# Altium PCB SPlitRail_DC-DC_Converter_PCB.PcbDoc
Units mil, origin at the board's own origin, x right, y up, seen from the top; angles counter-clockwise.
Board outline 3356.49 x 1978.53 mil, 2 copper layers (Top Layer, Bottom Layer), stack 21 mil thick; 34 components, 18 nets, 77 pads, 158 vias.
Unrouted connection lines stored in the file: 5.
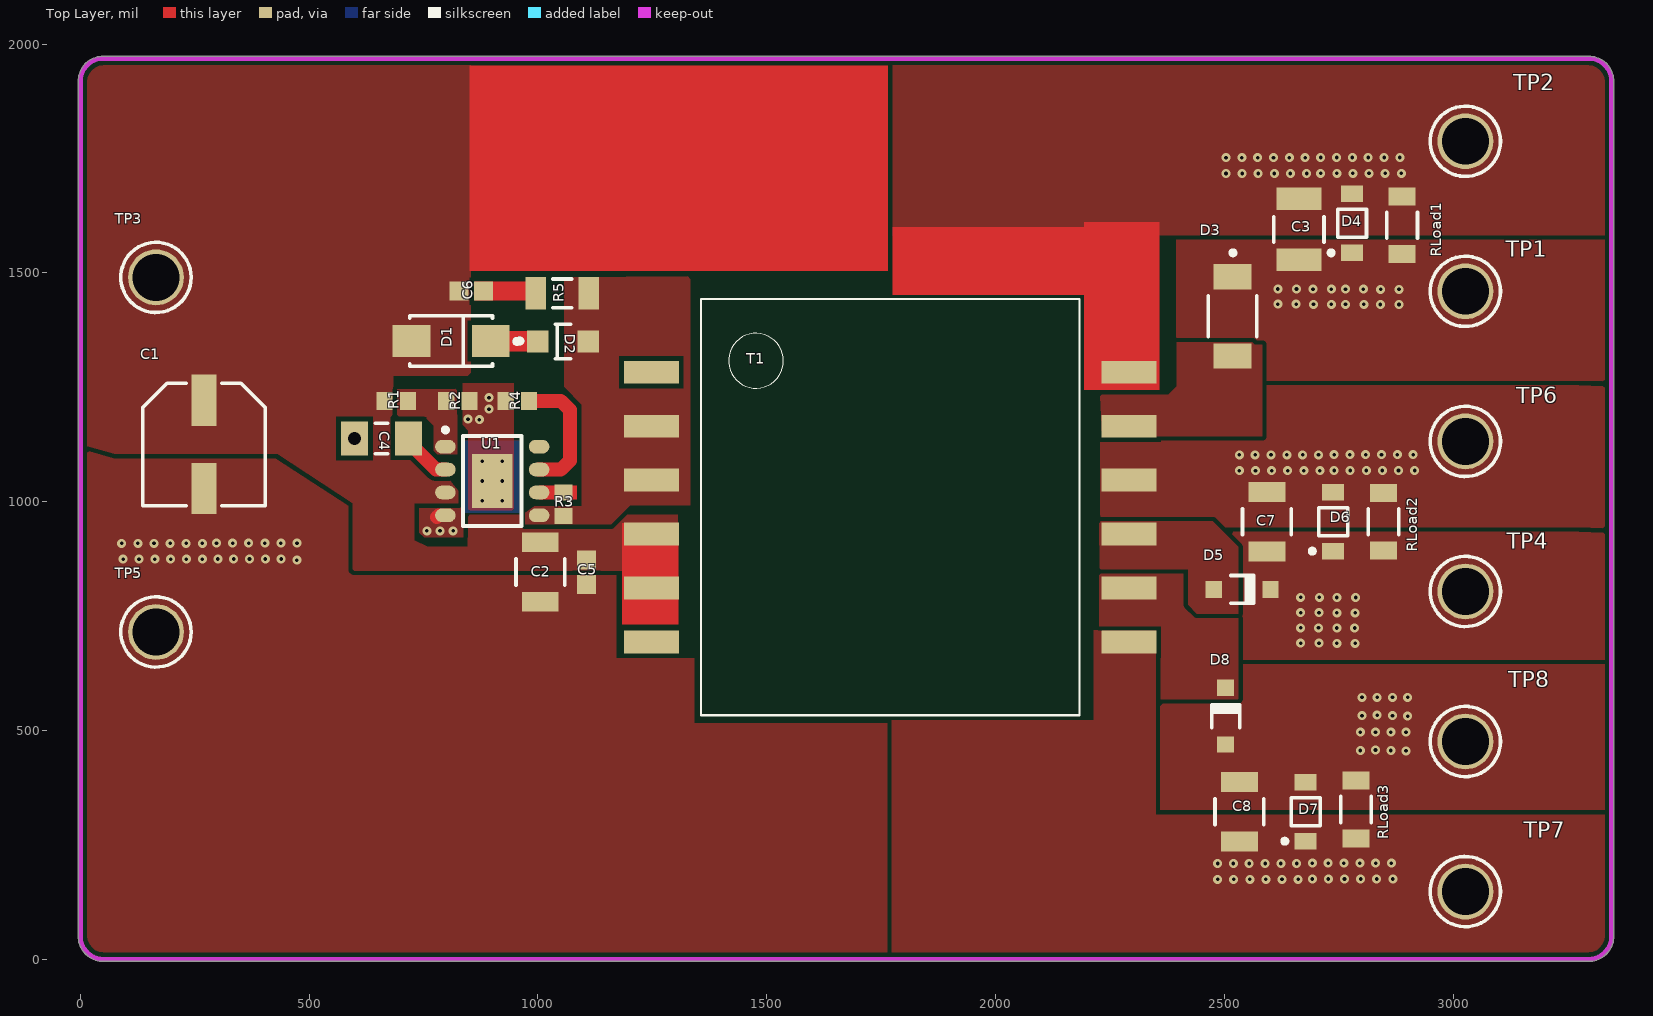
[diagram p0: Top Layer view]
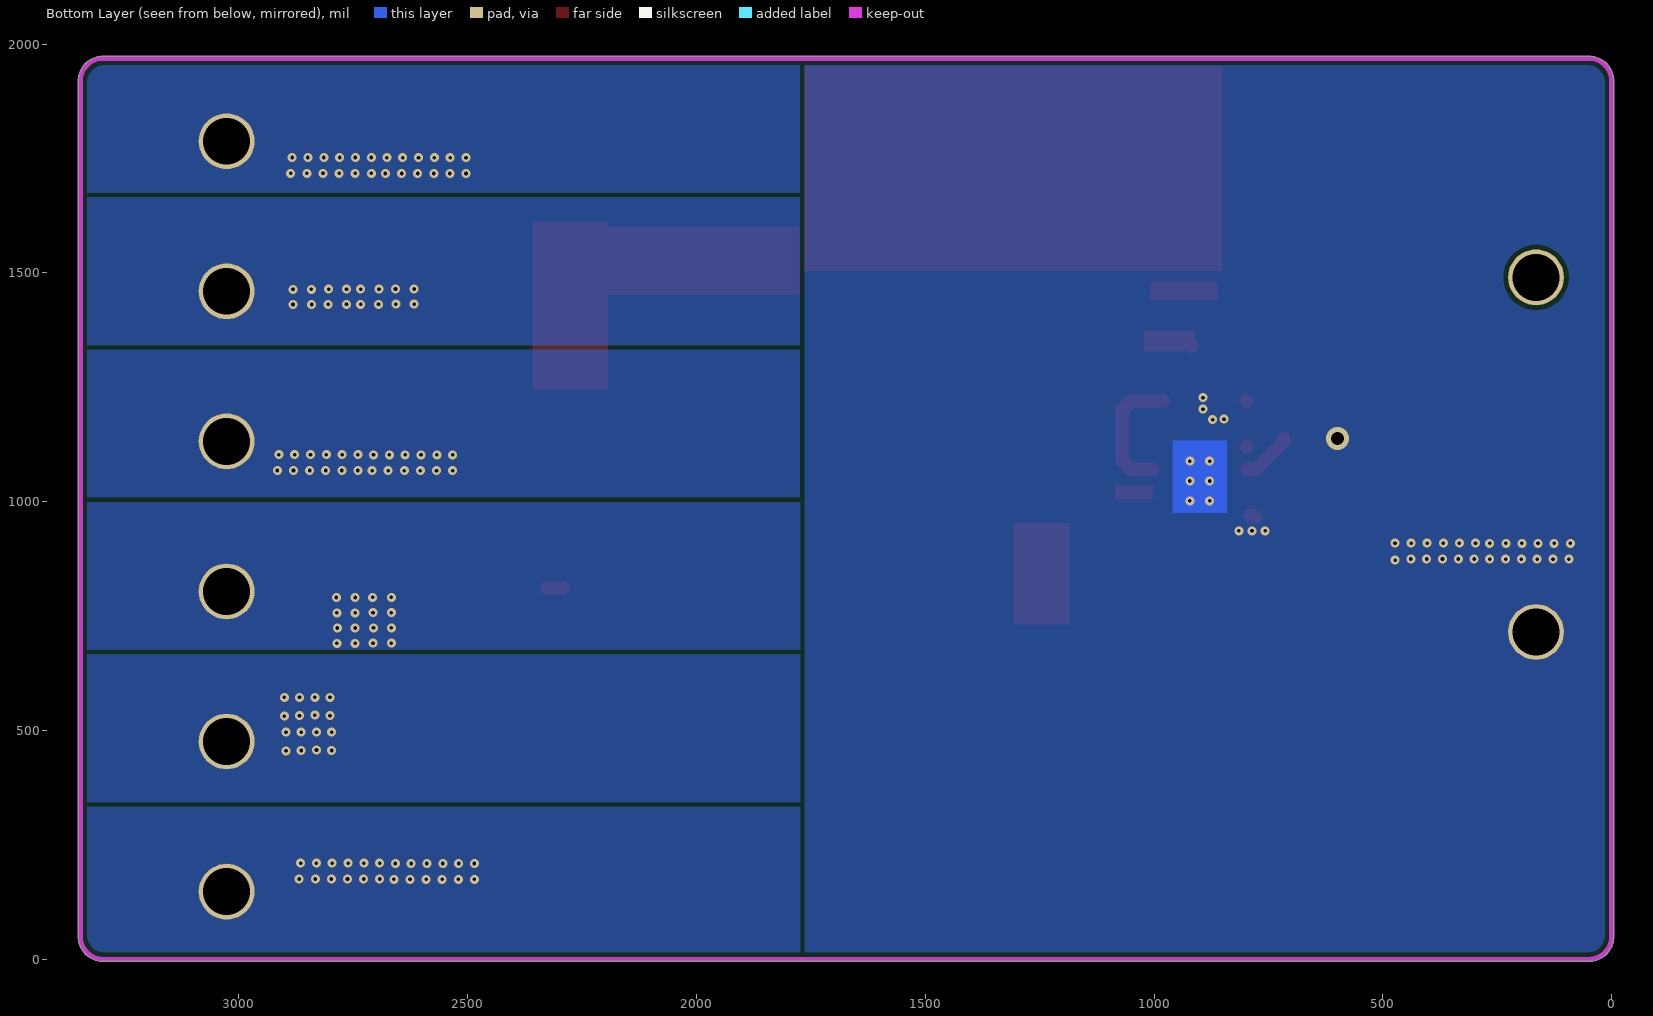
[diagram p1: Bottom Layer view, seen from below]
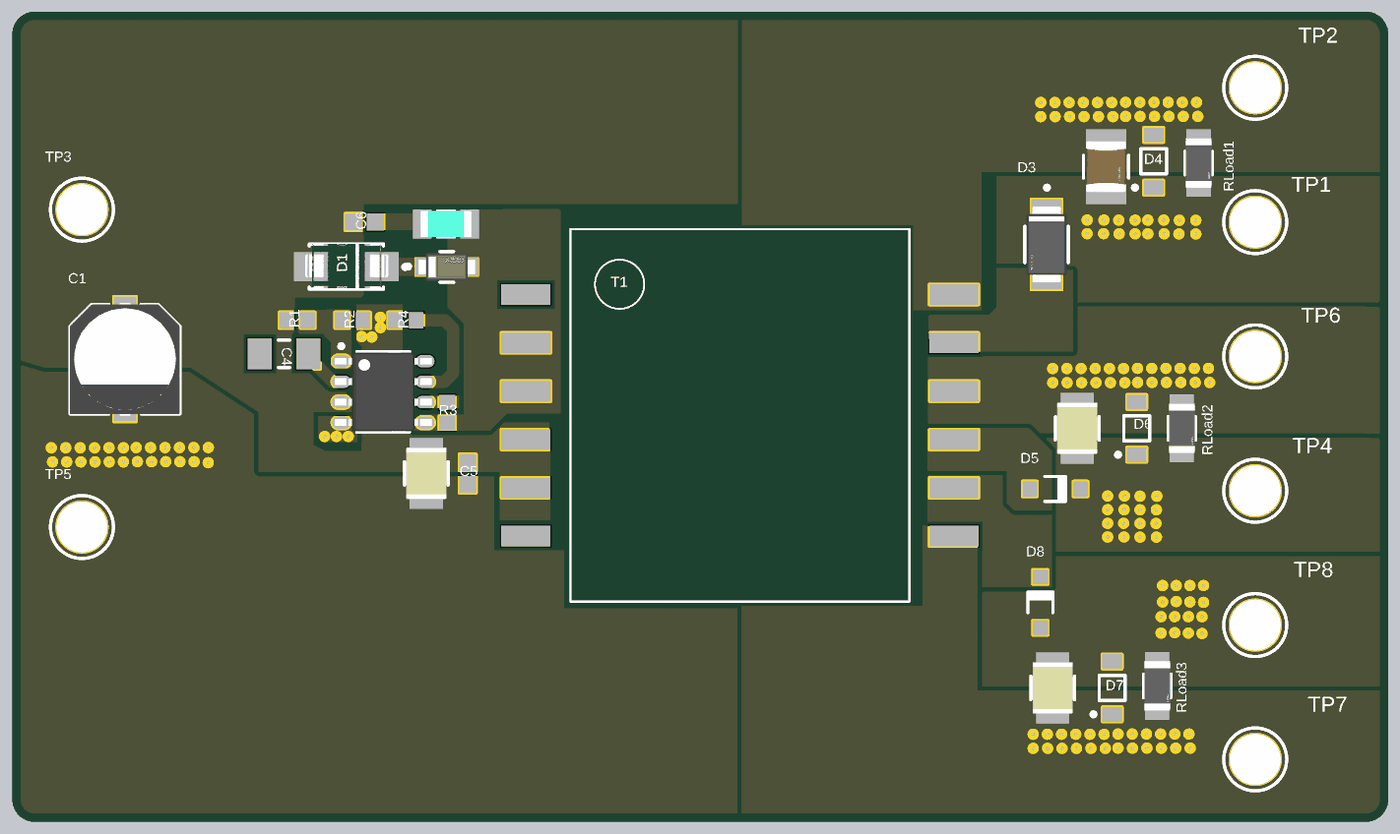
[diagram p2: 3D render of the assembled board from above, using the file's embedded part models]

## Layer stack, top to bottom
Top Solder: solder mask 0.4, Solder Resist, Dk 3.5
Top Layer: signal copper 1.4
Dielectric 2: prepreg 2.8, PP-006, Dk 4.1
Dielectric 1: dielectric 12.6, FR-4, Dk 4.8
Dielectric 3: prepreg 2.8, PP-006, Dk 4.1
Bottom Layer: signal copper 1.4
Bottom Solder: solder mask 0.4, Solder Resist, Dk 3.5

## Board outline
50,-5.01 cw(c50,50) -5.01,50 -5.01,1918.5 cw(c50,1918.5) 50,1973.52 3296.46,1973.52 cw(c3296.46,1918.5) 3351.47,1918.5 3351.47,50 cw(c3296.46,50) 3296.46,-5.01

## Design rules (kind name [scope] priority, off if disabled: settings)
Clearance [All] p1: gap=10 ignorepadtopadclearanceinfootprint=TRUE except(0: Arc-Hole Track-Hole SMDPad-Hole THPad-Hole Via-Hole Fill-Hole Poly-Hole Region-Hole Text-Hole)
MinimumSolderMaskSliver [All] p1 off: minsoldermaskwidth=10
PolygonConnect PolygonConnect_6 [All vs IsNamedPolygon('GND1_L01_P002') Or IsNamedPolygon('NETD2_2_L01_P001')] p1: connectstyle=Direct reliefconductorwidth=10 reliefentries=4 polygonreliefangle="90 Angle" airgapwidth=10
PolygonConnect PolygonConnect_5 [All vs IsNamedPolygon('NETR4_1_L01_P001')] p2: connectstyle=Direct reliefconductorwidth=10 reliefentries=4 polygonreliefangle="90 Angle" airgapwidth=10
PolygonConnect PolygonConnect_4 [All vs IsNamedPolygon('NETD2_2_L01_P001')] p3: connectstyle=Direct reliefconductorwidth=10 reliefentries=4 polygonreliefangle="90 Angle" airgapwidth=10
PolygonConnect PolygonConnect_3 [All vs IsNamedPolygon('GND_L01_P000')] p4: thpad.connectstyle=Direct thpad.reliefconductorwidth=10 thpad.reliefentries=4 thpad.polygonreliefangle="90 Angle" thpad.airgapwidth=10 smdpad.connectstyle=Direct smdpad.reliefconductorwidth=10 smdpad.reliefentries=4 smdpad.polygonreliefangle="90 Angle" smdpad.airgapwidth=10 via.connectstyle=Relief via.reliefconductorwidth=10 via.reliefentries=4 via.polygonreliefangle="90 Angle" via.airgapwidth=10
PolygonConnect PolygonConnect_2 [All vs IsNamedPolygon('GND_L01_P000')] p5: connectstyle=Relief reliefconductorwidth=10 reliefentries=4 polygonreliefangle="90 Angle" airgapwidth=10
PolygonConnect PolygonConnect_1 [All vs IsNamedPolygon('GND_L01_P000')] p6: thpad.connectstyle=Direct thpad.reliefconductorwidth=10 thpad.reliefentries=4 thpad.polygonreliefangle="90 Angle" thpad.airgapwidth=10 smdpad.connectstyle=Direct smdpad.reliefconductorwidth=10 smdpad.reliefentries=4 smdpad.polygonreliefangle="90 Angle" smdpad.airgapwidth=10 via.connectstyle=Relief via.reliefconductorwidth=10 via.reliefentries=4 via.polygonreliefangle="90 Angle" via.airgapwidth=10
PolygonConnect [All] p7: connectstyle=Direct reliefconductorwidth=10 reliefentries=4 polygonreliefangle="90 Angle" airgapwidth=10
RoutingVias [All] p1 off: holewidth=39.37 width=49.21 viastyle="Through Hole" minholewidth=9.84 minwidth=19.68 maxholewidth=39.37 maxwidth=49.21 useviatemplates=TRUE viatemplateguid#1={C01CA102-A0C5-4EF5-919D-0AE4D39FA0B3} viatemplatename#1=v50h20
SilkToSilkClearance [All] p1 off: silktosilkclearance=10
SilkToSolderMaskClearance [IsPad] p1 off: minsilkscreentomaskgap=10 clearancetoexposedcopper=TRUE
SolderMaskExpansion [All] p1: expansion=4 istentingtop=FALSE
UnRoutedNet [All] p1: checkbadconnections=TRUE
Width Width_1 [All] p1: maxlimit=30 minlimit=10 preferedwidth=20 minimp=50.000000 maximp=50.000000 favimp=50.000000
Width [All] p2: maxlimit=10 minlimit=10 preferedwidth=10
26 further rules are at their usual default settings.

## Components (designator, comment, footprint, x,y, rotation, side; value= is the part's Value field where it differs from the comment)
C1 "UCM1H220MCL1GS" PNSC-EEE-FK1H220P_L 270,1125 r270 top
C2 "" FP-GRM32-0_3-MFG 1005,846 r270 top value=50V
C3 "22uf 1210" FP-EMK325A-M-MFG 2663,1595 r270 top value=100uF
C4 "C1206C105K3RACTU" CAPC3216X180X50ML20T25 658,1138 r0 top
C5 "UMK107BJ105KA-T" CAPC1608X90X35ML10T25 1106,845.57 r90 top
C6 "UMK107BJ105KA-T" CAPC1608X90X35ML10T25 854,1460 r180 top
C7 "" FP-GRM32-0_3-MFG 2593,956 r90 top value=25V
C8 "" FP-GRM32-0_3-MFG 2533,322 r90 top value=25V
D1 "SMAJ24A" FP-SMAJ-MFG 810,1351 r180 top
D2 "PMEG10010ELRX" FP-SOD123W-MFG 1055,1350 r0 top value=170pF
D3 "PMEG6030EP" FP-SOD128-MFG 2518,1405 r270 top
D4 "BZT52-B5V6J" ONSC-SOD-123-2-425-04_V 2779.35,1608.13 r90 top
D5 "BAV19WTR" DIOD-SOD123-2_V 2539,808 r0 top
D6 "BZT52-B16J" ONSC-SOD-123-2-425-04_V 2738,956 r90 top
D7 "BZT52-B16J" ONSC-SOD-123-2-425-04_V 2678,322 r90 top
D8 "BAV19WTR" DIOD-SOD123-2_V 2503,530.99 r90 top
R1 "1M" RESC1608X55X30NL20T20 690,1220 r0 top
R2 "200K" RESC1608X55X30NL20T20 825,1220 r0 top
R3 "154K" RESC1608X55X30NL20T20 1056,994 r90 top
R4 "10k" RESC1608X55X30NL20T20 955,1220 r180 top
R5 "RN732BTTD50R0B25" FP-RN732B-IPC_B 1053,1455 r180 top
RLoad1 "RC1206JR-070RL" FP-RC1206-MFG 2889,1603.86 r270 top value=0Ω
RLoad2 "RC1206JR-070RL" FP-RC1206-MFG 2848,956 r270 top value=0Ω
RLoad3 "RC1206JR-070RL" FP-RC1206-MFG 2788,327 r270 top value=0Ω
T1 "750315039" EFD20_SMT_H_12PIN_(5899) 1770.02,987.78 r0 top
TP1 "1502-2" KSTN-1502-2 3027,1459.57 r0 top
TP2 "1502-2" KSTN-1502-2 3027,1787.57 r0 top
TP3 "1502-2" KSTN-1502-2 165,1490 r0 top
TP4 "1502-2" KSTN-1502-2 3027,803.57 r90 top
TP5 "1502-2" KSTN-1502-2 165,715 r0 top
TP6 "1502-2" KSTN-1502-2 3027,1131.57 r90 top
TP7 "1502-2" KSTN-1502-2 3027,147.57 r0 top
TP8 "1502-2" KSTN-1502-2 3027,475.57 r0 top
U1 "LT8302ES8E#PBF" LT-S8E-8_V 900,1045 r0 top

## Footprints (in the part's own frame and the unit in brackets; to place one, negate y for a bottom-side part, rotate by r counter-clockwise, add the part's x,y. Pads: shape width x height; smd on the part's side, far side on the other; paste and mask are expansions set on the pad)
CAPC1608X90X35ML10T25 [mm] "Chip Capacitor, 2-Leads, Body 1.70x0.90mm, IPC Low Density"
  rect 1.05x1.05 smd: 1(-0.675,0) 2(0.675,0)
  body extent -0.85,-0.45 0.85,0.45, height 0.9
CAPC3216X180X50ML20T25 [mm] "Chip Capacitor, 2-Leads, Body 3.40x1.80mm, IPC Low Density"
  rect 1.5x1.9 smd: 1(-1.5,0) 2(1.5,0)
  silkscreen extent -0.35,-0.85 0.35,0.85, body extent -1.7,-0.9 1.7,0.9, height 1.8
DIOD-SOD123-2_V [mm] "SOD123, 2-Leads, Body 2.7x1.55mm, Height 1.45mm"
  rect 0.9x0.95 smd: 1(-1.575,0) 2(1.575,0)
  silkscreen extent -0.64,-0.82 0.64,0.77, body extent -1.35,-0.77 1.35,0.77, height 1.45
EFD20_SMT_H_12PIN_(5899) [mil]
  rect 120x50 smd: 1(-522,295) 2(-522,177) 3(-522,59) 4(-522,-59) 5(-522,-177) 6(-522,-295) 7(522,-295) 8(522,-177) 9(522,-59) 10(522,59) 11(522,177) 12(522,295)
  silkscreen extent -414,-455 413,455
FP-EMK325A-M-MFG [mm]
  rect 1.25x2.5 smd paste+0 mask+0: 1(-1.7,0) 2(1.7,0)
  silkscreen extent -0.7,-1.4 0.7,1.4, body extent -2.42,-1.5 2.42,1.5, height 0.25
FP-GRM32-0_3-MFG [mm]
  rect 1.1x2.05 smd paste+0 mask+0: 1(-1.65,0) 2(1.65,0)
  silkscreen extent -0.72,-1.35 0.72,1.35, body extent -2.3,-1.45 2.3,1.45, height 0.25
FP-RC1206-MFG [mm]
  rect 1x1.5 smd paste+0 mask+0: 1(-1.6,0) 2(1.6,0)
  silkscreen extent -0.72,-0.85 0.72,0.85, body extent -2.2,-0.95 2.2,0.95, height 0.25
FP-RN732B-IPC_B [mil]
  rect 45.48x71.11 smd paste+0 mask+0: 1(-58.09,0) 2(58.09,0)
  silkscreen extent -21,-31 21,31, body extent -91,-45 91,45, height 10
FP-SMAJ-MFG [mm]
  rect 2.1x1.8 smd paste+0 mask+0: 1(-2.2,0) 2(2.2,0)
  silkscreen extent -3.95,-1.4 2.3,1.4, body extent -3.35,-1.5 3.35,1.5, height 0.25
FP-SOD123W-MFG [mm]
  rect 1.2x1.2 smd paste-1000 mask+0: 1(-1.4,0) 2(1.4,0)
  silkscreen extent -2.7,-0.95 0.43,0.95, body extent -2.2,-1.05 2.2,1.05, height 0.25
FP-SOD128-MFG [mm]
  rect 1.4x2.1 smd paste-1000 mask+0: 1(-2.2,0) 2(2.2,0)
  silkscreen extent -3.65,-1.35 1.12,1.35, body extent -3.1,-1.7 3.1,1.7, height 0.25
KSTN-1502-2 [mm] "Terminal DBL Turret, Dia 3.18mm"
  round 3.1 hole 2.6: 1(0,0)
  silkscreen extent -1.95,-1.95 1.95,1.95, body extent -1.59,-1.59 1.59,1.59, height 5.56
LT-S8E-8_V [mm] "SOIC, 8-Leads, Body 4.9x3.9mm, Pitch 1.27mm, Thermal Pad 3.25x2.26mm, Recommended"
  oval 1.143x0.76 smd: 1(-2.602,1.905) 2(-2.602,0.635) 3(-2.602,-0.635) 4(-2.602,-1.905) 5(2.601,-1.905) 6(2.601,-0.635) 7(2.601,0.635) 8(2.601,1.905)
  rect 2.26x2.99 smd: 9(0,0)
  silkscreen extent -2.73,-2.5 1.62,2.96, body extent -3.01,-2.45 3.01,2.45, height 1.75
ONSC-SOD-123-2-425-04_V [mm] "SOD, 2-Leads, Body 2.69x1.6mm"
  rect 0.91x1.22 smd: 1(-1.635,0) 2(1.635,0)
  silkscreen extent -1.76,-0.8 0.78,1.28, body extent -1.35,-0.8 1.35,0.8, height 1.35
PNSC-EEE-FK1H220P_L [mm] "CAPAE, 2-Leads, Base 6.6x6.6mm, IPC High Density"
  rect 2.85x1.4 smd: 1(-2.45,0) 2(2.45,0)
  silkscreen extent -3.4,-3.4 3.4,3.4, body extent -3.5,-3.4 3.5,3.4, height 6.1
RESC1608X55X30NL20T20 [mm] "Chip Resistor, 2-Leads, Body 1.60x0.80mm, IPC Medium Density"
  rect 0.9x1 smd: 1(-0.65,0) 2(0.65,0)
  body extent -0.9,-0.5 0.9,0.5, height 0.55

## Part data
C1: library part CMP-2000-06209-1, "Cap Aluminum Lytic, 22 uF, +/- 20%, 6.3 to 100 V, -55 to 105 degC, 2-Pin SMD, RoHS, Tape and Reel", Capacitance=22µF, Case Size/Dimension=Ø6.3x5.8mm, Lifetime@Temperature=2000Hrs@105°C, Manufacturer=Panasonic, Operating Temp Range=-55to+105°C, Operating Temp-Max=105°C, Package Description="2-Pin Aluminum Electrolytic Capacitor, Base 6.6 x 6.6 mm, Height 6.10 mm", Package Reference=EEE-FK1H220P, Rated Voltage=50V, Ripple Current=165mA, Datasheet URL=http://www.mouser.com/ds/2/315/ABA0000CE120-68386.pdf, Datasheet Version=03/2014, Impedance=0.88O, Manufacturer URL=http://www.panasonic.com/, Mounting Technology=SurfaceMount, Series=FK, Type=Can
C2: library part CMP-2000-05259-2, "CAP CER 10uF 50V  1210", 3DS Part Number=220-00002, Capacitance=10uF, Manufacturer=Murata, Manufacturer Part Number=GRM32ER60J107ME20L, Package=GRM32-0.3, Temperature="-55°C to +85°C", Temperature Characteristic=X5R, Temperature Coefficient=15%, Temperature Range High=+85°C, Temperature Range Low=-55°C, Tolerance=20%, Voltage=6.3V, Automotive=No, Category=Cap, ComponentLink2Description=Datasheet, ComponentLink2URL=https://search.murata.co.jp/Ceramy/image/img/A01X/G101/ENG/GRM32ER60J107ME20-01.pdf, Device Class L1="Passive Components", Device Class L2=Capacitors, Device Class L3="Ceramic Capacitors", Digikey Description="CAP CER 100UF 6.3V X5R 1210", Height=2.7mm, Ipc Land Pattern Name=CAPC320250X250, Lead Free=Yes, Material=Ceramic, Octopart=https://octopart.com/grm32er60j107me20l-murata-197007, RoHS=TRUE, Voltage Rating=6.3V
C3: library part CMP-2000-05020-2, "CAP CER 100UF 16V X5R 1210", Capacitance=100uF, Manufacturer="Taiyo Yuden", Manufacturer Part Number=EMK325ABJ107MM-T, Package=EMK325A-M, Temperature="-55°C to +85°C", Temperature Characteristic=X5R, Temperature Coefficient=15%, Temperature Range High=+85°C, Temperature Range Low=-55°C, Tolerance=20%, Voltage Rating=16V, Automotive=No, Category=Cap, ComponentLink2Description=Datasheet, ComponentLink2URL=https://www.yuden.co.jp/productdata/catalog/mlcc01_e.pdf, Device Class L1="Passive Components", Device Class L2=Capacitors, Device Class L3="Ceramic Capacitors", Digikey Description="CAP CER 100UF 16V X5R 1210", Height=2.8mm, Ipc Land Pattern Name=CAPC320250X250, Lead Free=Yes, Material=Ceramic, Mouser Description="1210 100 uF 16 V ±20% Tolerance X5R SMT Multilayer Ceramic Capacitor", Octopart=https://octopart.com/emk325abj107mm-t-taiyo+yuden-20815747, RoHS=TRUE
C4: library part CMP-2000-04991-1, "Chip Capacitor, 1 uF, +/- 10%, 25 V, -55 to 125 degC, 1206 (3216 Metric), RoHS, Tape and Reel", Capacitance=1uF, Capacitance - nF=1000nF, Case Code - in=1206, Case Code - mm=3216, Case Height=1.6mm, Case Length=3.2mm, Dielectric=X7R, Manufacturer=Kemet, Maximum Operating Temperature=+125C, Minimum Operating Temperature=-55C, Operating Temperature Range=-55Cto+125C, Package / Case=1206(3216metric), Package Description="2-Pin Surface Mount Device, Body 3.2 x 1.6 mm", Temperature Coefficient / Code=+/-15%, Tolerance=10%, Voltage Rating=25V, Brand=Kemet, Case Width=1.6mm, Class=Class1, Datasheet URL=https://ciiva.com/datasheet-click-18194173?src=ciiva&sig=6daff8c4, Datasheet Version=Jul-14, Dimensions=1.6mmWx3.2mmLx1.6mmH, Factory Pack Quantity=2000, Manufacturer URL=http://www.kemet.com/, Package Reference=1206, Packaging=Reel, Product=GeneralTypeMLCCs, Product Category=MultilayerCeramicCapacitorsMLCC-SMD/SMT, RoHS=Details, Series=C1206C, Termination Style=SMD/SMT, Type=SMDMLCCX7R6.3-250VDCCommericalGrade, Voltage Rating DC=25V
C5: library part CMP-2000-05447-1, "Chip Capacitor, 1 uF, +/- 10%, 50 V, -55 to 85 degC, 0603 (1608 Metric), RoHS, Tape and Reel", Capacitance=1µF, Manufacturer="Taiyo Yuden", Operating Temperature=-55degC~85degC, Package / Case=0603(1608Metric), Package Description="2-Pin Surface Mount Device, Body 1.6 x 0.8 mm", Package Reference=603, Ratings=-, Standard Package=1, Temperature Coefficient=X5R, Tolerance=±10%, Voltage - Rated=50V, Applications=GeneralPurpose, Catalog Drawings=xMKSeries_0603_0.8, Category=Capacitors, Datasheet URL=https://datasheet.ciiva.com/15922/336umk107bj105ka-t-15922611.pdf, Datasheet Version=Mar-13, Family=CeramicCapacitors, Features=-, Height - Seated (Max)=-, Lead Spacing=-, Lead Style=-, Manufacturer URL=http://www.t-yuden.com/, Mounting Type=SurfaceMount,MLCC, Online Catalog=MSeries, Other Names=587-2400-6, Packaging=Digi-Reel, Series=M, Size / Dimension="0.063\"Lx0.031\"W(1.60mmx0.80mm)", Thickness (Max)="0.035\"(0.90mm)"
C6: library part CMP-2000-05447-1, "Chip Capacitor, 1 uF, +/- 10%, 50 V, -55 to 85 degC, 0603 (1608 Metric), RoHS, Tape and Reel", Capacitance=270pF, Manufacturer="Taiyo Yuden", Operating Temperature=-55degC~85degC, Package / Case=0603(1608Metric), Package Description="2-Pin Surface Mount Device, Body 1.6 x 0.8 mm", Package Reference=603, Ratings=-, Standard Package=1, Temperature Coefficient=X5R, Tolerance=±10%, Voltage - Rated=50V, Applications=GeneralPurpose, Catalog Drawings=xMKSeries_0603_0.8, Category=Capacitors, Datasheet URL=https://datasheet.ciiva.com/15922/336umk107bj105ka-t-15922611.pdf, Datasheet Version=Mar-13, Family=CeramicCapacitors, Features=-, Height - Seated (Max)=-, Lead Spacing=-, Lead Style=-, Manufacturer URL=http://www.t-yuden.com/, Mounting Type=SurfaceMount,MLCC, Online Catalog=MSeries, Other Names=587-2400-6, Packaging=Digi-Reel, Series=M, Size / Dimension="0.063\"Lx0.031\"W(1.60mmx0.80mm)", Thickness (Max)="0.035\"(0.90mm)"
C7 C8: library part CMP-2000-05259-2, "CAP CER 10uF 50V  1210", 3DS Part Number=220-00002, Capacitance=22uF, Manufacturer=Murata, Manufacturer Part Number=GRM32ER60J107ME20L, Package=GRM32-0.3, Temperature="-55°C to +85°C", Temperature Characteristic=X5R, Temperature Coefficient=15%, Temperature Range High=+85°C, Temperature Range Low=-55°C, Tolerance=20%, Voltage=6.3V, Automotive=No, Category=Cap, ComponentLink2Description=Datasheet, ComponentLink2URL=https://search.murata.co.jp/Ceramy/image/img/A01X/G101/ENG/GRM32ER60J107ME20-01.pdf, Device Class L1="Passive Components", Device Class L2=Capacitors, Device Class L3="Ceramic Capacitors", Digikey Description="CAP CER 100UF 6.3V X5R 1210", Height=2.7mm, Ipc Land Pattern Name=CAPC320250X250, Lead Free=Yes, Material=Ceramic, Octopart=https://octopart.com/grm32er60j107me20l-murata-197007, RoHS=TRUE, Voltage Rating=6.3V
D1: library part CMP-08607-000085-1, "TVS DIODE 24V 38.9V DO214AC", Breakdown Voltage=26.7V, Clamping Voltage=38.9V, Manufacturer="Littelfuse Inc", Max Junction Temp=+150°C, Package=SMAJ, Peak Pulse Current=10.3A, Peak Pulse Power=400W, Reverse Standoff Voltage=24V, Temperature="-65°C to +150°C", Temperature Range Low=-65°C, Automotive=No, Category=Diode, ComponentLink2Description=Datasheet, ComponentLink2URL=https://www.littelfuse.com/~/media/electronics/datasheets/tvs_diodes/littelfuse_tvs_diode_smaj_datasheet.pdf.pdf, Device Class L1="Circuit Protection", Device Class L2="TVS Diodes", Device Class L3=unset, Digikey Description="TVS DIODE 24V 38.9V DO214AC", Direction=Unidirectional, Height=2.29mm, Lead Free=Yes, Manufacturer Part Number=SMAJ24A, Mouser Description="In a Pack of 25, Littelfuse SMAJ24A, Uni-Directional TVS Diode, 400W, 2-Pin DO-214AC", Number Of Channels=1, Octopart=https://octopart.com/smaj24a-littelfuse-350003, RoHS=TRUE, Temperature Range High=+150°C
D2: library part CMP-14398-000004-1, "DIODE SCHOTTKY 30V 1A SOD123W", Ambient Temperature Range High=+150°C, Ambient Temperature Range Low=-55°C, Capacitance=170pF, Forward Current=1A, Manufacturer=Nexperia, Manufacturer Part Number=PMEG3010BER,115, Max Surge Forward Current=50A, Package=SOD123W, Peak Reverse Current=15uA, Reverse Voltage=30V, Temperature="to +150°C", Automotive=Yes, Automotive Grade="Grade 0", Category=Diode, ComponentLink2Description=Datasheet, ComponentLink2URL=https://assets.nexperia.com/documents/data-sheet/PMEG3010BER.pdf, Device Class L1="Discrete Semiconductors", Device Class L2=Diodes, Device Class L3="Schottky Diodes", Digikey Description="DIODE SCHOTTKY 30V 1A SOD123W", Footprint Url=https://assets.nexperia.com/documents/outline-drawing/SOD123W.pdf, Height=1.1mm, Lead Free=Yes, Max Junction Temp=+150°C, Octopart=https://octopart.com/pmeg3010ber%2C115-nexperia-78741454, RoHS=TRUE, Temperature Range High=+150°C
D3: library part CMP-14398-000017-1, "PMEG60T50ELP/SOD128/FLATPOWER"
D4 D6 D7: library part CMP-1060-00514-1, "Zener Voltage Regulator, 500 mW, 2-Pin SOD-123, Pb-Free, Tape and Reel", Manufacturer="On Semiconductor", PartNumber=SZMMSZ3V3T1G, ComponentLink1Description="Manufacturer URL", ComponentLink1URL=http://www.onsemi.com/, ComponentLink2Description=Datasheet, ComponentLink2URL=http://www.onsemi.com/pub_link/Collateral/MMSZ2V4T1-D.PDF, ComponentLink3Description="Package Specification", ComponentLink3URL=http://www.onsemi.com/pub_link/Collateral/425-04.PDF, DatasheetVersion="Rev. 11", Mounting Technology="Surface Mount", P Max (W)=0.5, PackageDescription="2-Pin SOD, Body 1.6 x 2.69 mm", PackageReference=SOD-123-2-425-04, PackageVersion="Rev. G, 10/2009", Packing="Tape and Reel", RoHS=Pb-Free
D5 D8: library part CMP-2000-04932-2, "Fast Switching Diode, 100 V, 0.15 A, -65 to 150 degC, 2-Pin?SOD123, RoHS, Tape and Reel", If - Forward Current=0.15A, Ir - Reverse Current=1uA, Manufacturer=DiodesIncorporated, Max Surge Current=2A, Maximum Operating Temperature=+150C, Minimum Operating Temperature=-65C, Operating Temperature Range=-65Cto+150C, Package / Case=SOD-123, Package Reference=SOD123-2, Peak Reverse Voltage=100V, Vf - Forward Voltage=1.25V, Brand=DiodesIncorporated, Configuration=Single, Datasheet URL=http://www.farnell.com/datasheets/1915529.pdf, Datasheet Version="Rev. 24-2, 10/2013", Factory Pack Quantity=3000, Height=1.25mm, Length=2.85mm, Manufacturer URL=http://www.diodes.com/, Mounting Style=SMD/SMT, Package URL=http://www.diodes.com/datasheets/ds18004.pdf, Packaging=Reel, Product=SwitchingDiodes, Product Category=Diodes-GeneralPurpose,Power,Switching, Recovery Time=4ns, RoHS=True, Series=1N4148, Type=SwitchingDiode, Unit Weight=0.000353oz, Width=1.7mm
R1 R2 R3 R4: library part CMP-2000-00882-1, Manufacturer=Panasonic, Part Number=ERA3AEB112V
R5: library part CMP-04015-000187-1, "50Ω ±0.1% 0.125W, 1/8W Chip Resistor 1206 (3216 Metric) Moisture Resistant Thin Film", Case Code (Imperial)=1206, Case Code (Metric)=3216, Max Operating Temperature=125°C, Min Operating Temperature=-55°C, Package Quantity=5000, Power Rating=125mW, Resistance=50R, Temperature Coefficient=25ppm/°C, Tolerance=0.1%, Voltage Rating=150V, Case/Package=1206, Composition="Thin Film", Height=0.6mm, Length=3.2mm, Packaging="Tape and Reel", Termination=SMD/SMT, Width=1.6mm
RLoad1 RLoad2 RLoad3: library part CMP-2100-03681-2, "RES SMD 0 OHM JUMPER 1/4W 1206", Manufacturer=YAGEO, Package=RC1206, Power Rating=0.25W, Resistance=0Ω, Temperature="-55°C to +155°C", Temperature Coefficient=300ppm/°C, Temperature Range High=+155°C, Temperature Range Low=-55°C, Tolerance=5%, Voltage Rating=200V, Automotive=No, Category=Res, ComponentLink2Description=Datasheet, ComponentLink2URL=https://www.yageo.com/upload/media/product/productsearch/datasheet/rchip/PYu-RC_Group_51_RoHS_L_10.pdf, Composition="Thick Film", Device Class L1="Passive Components", Device Class L2=Resistors, Device Class L3="Chip SMD Resistors", Digikey Description="RES SMD 0 OHM JUMPER 1/4W 1206", Footprint Url=https://www.yageo.com/upload/website/yageo_PYu-R_Mount_10_19050818_343.pdf, Height=0.65mm, Ipc Land Pattern Name=RESC310160X55, Lead Free=Yes, Manufacturer Part Number=RC1206JR-070RL, Mouser Description="Resistor: thick film; SMD; 1206; 0O; 0.25W; ±5%; -55÷155°C", Octopart=https://octopart.com/rc1206jr-070rl-yageo-40025601, RoHS=TRUE, Series=RC
T1: "Isolated Buck Converters For For DC/DC Converters SMPS Transformer 1500Vrms Isolation 250kHz Surface Mount", Package="WÃ¼rth Elektronik", Availability="In Stock", Check_prices=https://www.snapeda.com/parts/750315039/W%C3%BCrth%20Elektronik/view-part/4792337/?ref=eda, MF="WÃ¼rth Elektronik", MP=750315039, Price=None, Purchase-URL=https://pricing.snapeda.com/search/part/750315039/?ref=eda, SnapEDA_Link=https://www.snapeda.com/parts/750315039/W%C3%BCrth%20Elektronik/view-part/4792337/?ref=snap
TP1 TP2 TP3 TP4 TP5 TP6 TP7 TP8: library part CMP-1672-00001-5, "Terminal DBL Turret, Through Hole, RoHS", Manufacturer=Keystone, Package Quantity=1, ComponentLink1Description="Manufacturer URL", ComponentLink1URL=http://www.keyelco.com/, ComponentLink2Description=Datasheet, ComponentLink2URL=http://www.keyelco.com/product-pdf.cfm?p=3293, Contact Finish=Tin, Contact Material=Brass, DatasheetVersion="Rev. A, 02/2008", Lead Pitch="0.218 inch", Length="2.77 mm", Mount="Through Hole", Mounting Technology="Through Hole", PackageDescription="1-Pin Through Hole Device, Dia 3.18 mm", PackageReference=1502-2, Pins=50, REACH SVHC="No SVHC", RoHSCompliant=true
U1: library part CMP-0492-02713-1, "Micropower No-Opto Isolated Flyback Converter, 2.8 to 42 V, -40 to 125 degC, 8-Pin SOIC (S8E), RoHS, Tube", Output Current="3.6 A", PartNumber=LT8302, Temperature Max="125 degC", Temperature Min="-40 degC", ComponentLink1Description="Manufacturer URL", ComponentLink1URL=http://www.linear.com/, ComponentLink2Description=Datasheet, ComponentLink2URL=http://cds.linear.com/docs/en/datasheet/8302fa.pdf, ComponentLink3Description="Package Specification", ComponentLink3URL=http://cds.linear.com/docs/en/packaging/05081857_A_S8E.pdf, DatasheetVersion="Rev. A", Mounting Technology="Surface Mount", Number of Outputs=1, PackageDescription="8-Pin Plastic Small Outline Integrated Circuit Package, Body 4.90 x 3.90 mm, Pitch 1.27 mm", PackageVersion="Rev. A, 10/2013", Packing=Tube, RoHS=TRUE, VIN Max="42 V", VIN Min="2.8 V"

## Via types
v1: diameter 19.68, hole 7.87, Top Layer to Bottom Layer, 157 vias
v2: diameter 50, hole 28, Top Layer to Bottom Layer, 1 vias

## Nets (pads, with @x,y where several pads share a name; then routed paths per layer and width w, separated by ;. In a path a pad name is that pad's centre, name@x,y a point inside that pad or via, vN(x,y) a via of type N, cw(c..) or ccw(c..) an arc to the next point about the centre after c; other vN are vias at no path point)
+5: C3.2 D3.1 D4.1 RLoad1.2 TP1.1
  other v1: 2617,1431.33 2657,1431.33 2695,1431 2734,1431 2765,1431 2805,1431 2841,1430.67 2882,1430.67 2694,1464.33 2734,1464.33 2765,1464.33 2804,1464.33 2842,1464 2882,1464 2617,1464.67 2658,1464.67
+15: C7.1 D5.2 D6.1 RLoad2.2 TP4.1
  other v1: 2746,690.33 2786,690.33 2667,690.67 2707,690.67 2667,724 2706,724 2746,723.67 2785,723.67 2667,757.33 2707,757.33 2746,757 2786,757 2746,790.33 2787,790.33 2667,790.67 2708,790.67
-15: C8.2 D7.2 D8.1 RLoad3.1 TP8.1
  other v1: 2897.33,455 2797.33,456 2864,456 2830.67,457 2797.33,496 2830.67,496 2864,496 2897.33,496 2901,531 2801,532 2867.67,532 2834.33,533 2801,572 2834.33,572 2867.67,572 2901,572
GND: C1.2 C2.2 C4.1 C5.1 R2.2 R4.2 TP5.1 U1.4 U1.9 | length 12.7
  Top Layer w30: U1.4@779,966 782.96,969.96 U1.4@790.08,969.96
  other v1: 473,872 93.2,874 127.8,874 162.4,874 197,874 231.6,874 266.2,874 300.2,874.5 334.8,874.5 369.4,874.5 404,874.5 438.6,874.5 90.2,908.5 125.4,908.5 160.6,908.5 195.8,908.5 231,908.5 266.2,908.5 297.2,909 332.4,909 367.6,909 402.8,909 438,909 473.2,909 757,936.06 785.82,936.06 814.65,936.06 878.35,1001.69 921.65,1001.69 878.35,1045 921.65,1045 878.35,1088.31 921.65,1088.31 872,1179 847,1180 893,1202 893,1227
  other v2: 598.94,1138
GND1: C3.1 D4.2 RLoad1.1 T1.12 TP2.1
  other v1: 2503.87,1717.12 2539.07,1717.12 2574.27,1717.12 2609.47,1717.12 2644.67,1717.12 2679.87,1717.12 2710.87,1717.62 2746.07,1717.62 2781.27,1717.62 2816.47,1717.62 2851.67,1717.62 2886.87,1717.62 2503.87,1751.62 2538.47,1751.62 2573.07,1751.62 2607.67,1751.62 2642.27,1751.62 2676.87,1751.62 2710.87,1752.12 2745.47,1752.12 2780.07,1752.12 2814.67,1752.12 2849.27,1752.12 2883.87,1752.12
GND2: C7.2 D6.2 RLoad2.1 T1.10 TP6.1
  other v1: 2533,1067.5 2568.2,1067.5 2603.4,1067.5 2638.6,1067.5 2673.8,1067.5 2709,1067.5 2740,1068 2775.2,1068 2810.4,1068 2845.6,1068 2880.8,1068 2916,1068 2533,1102 2567.6,1102 2602.2,1102 2636.8,1102 2671.4,1102 2706,1102 2740,1102.5 2774.6,1102.5 2809.2,1102.5 2843.8,1102.5 2878.4,1102.5 2913,1102.5
GND3: C8.1 D7.1 RLoad3.2 T1.7 TP7.1
  other v1: 2485.4,174.5 2520.6,174.5 2555.8,174.5 2591,174.5 2626.2,174.5 2661.4,174.5 2692.4,175 2727.6,175 2762.8,175 2798,175 2833.2,175 2868.4,175 2485.4,209 2520,209 2554.6,209 2589.2,209 2623.8,209 2658.4,209 2692.4,209.5 2727,209.5 2761.6,209.5 2796.2,209.5 2830.8,209.5 2865.4,209.5
NetC4_2: C4.2 U1.2 | length 113.3
  Top Layer w30: C4.2 717.06,1130.13 777.14,1070.04 797.54,1070.04 U1.2
NetC6_1: C6.1 R5.2
NetD1_1: D1.1 D2.1 | length 9.9
  Top Layer w30: D1.1@917.61,1340 D1.1@921.11,1343.5 ; D2.1@993.38,1343.5 D2.1@996.88,1347
NetD2_2: D2.2 R3.1 R5.1 T1.2 T1.3 U1.5
NetD3_2: D3.2 T1.11
NetD5_1: D5.1 T1.9
NetD8_2: D8.2 T1.8 | length 35
  Top Layer w30: T1.8 T1.8@2327.02,810.78
NetR1_2: R1.2 R2.1 U1.1 | length 2.2
  Top Layer w30: U1.1 798.45,1120 U1.1@798.49,1120.04 ; R2.1@798.49,1219.08 R2.1
NetR3_2: R3.2 U1.6
NetR4_1: R4.1 U1.7 | length 283.6
  Top Layer w30: R4.1 1050,1220 1070,1200 1070,1090 1050.04,1070.04 1002.46,1070.04 U1.7
Vin: C1.1 C2.1 C5.2 C6.2 D1.2 R1.1 T1.4 T1.5 TP3.1 U1.3
pads on no net: T1.1 T1.6 U1.8

## Polygon pours and split planes (outlines as drawn)
Vin on Top Layer "VIN_L01_P035" (solid, pour order 35): 595,996 595,852 598,849 618,849 1305,849 1305,971 851,971 847,967 847,901 785,901 759,901 730,915.5 730,1003.62
+5 on Top Layer "+5_L01_P005" (solid, pour order 5): 2395,1594.08 2395,1264 3275,1264 3346.46,1262.15 3345.27,1324.78 3346.46,1377.95 3351.47,1377.95 3346.46,1574.8 3275,1595.77
GND1 on Top Layer "GND1_L01_P004" (solid, pour order 4): 1776.67,1973.52 3250.25,1973.52 3286.62,1961.87 3346.46,1971.85 3346.46,1771.65 3346.46,1574.8 3331.16,1582 3275,1582 1775,1582 1775,1971.85
-15 on Top Layer "3" (solid, pour order 9): 2362.02,657.78 2365.27,654.53 3275,654.53 3346.9,654.53 3351.47,590.55 3351.47,392.42 3351.47,315.94 3166.85,315.94 2350.39,315.94 2350.39,657.48
GND on Top Layer "GND_L01_P036" (solid, pour order 36): 0,1126 465,1126 738,853 1171,853 1171,658 1341,658 1341,516 1780,516 1780,28 1754,2 27,2 2,27
GND3 on Top Layer "GND3_L01_P008" (solid, pour order 8): 2215,719 2215,522 1773.62,522 1773.62,10.43 3341.24,4.54 3346.46,0 3351.47,196.85 3351.47,315.94 3266.71,315.94 2391.73,315.94 2371.06,315.94 2350.39,315.94 2350.39,327.76 2350.39,719
GND on Top Layer "GND_L01_P037" (solid, pour order 37): 835,1258 836,1259 947,1259 947,984 943,980 848,980 848,1155 835,1168
GND on Top Layer "GND_L01_P034" (solid, pour order 34): 776,990 836,990 837,989 837,922 751,922 741,932 741,988
Vin on Top Layer "VIN_L01_P033" (solid, pour order 33): 25,1981 0,1920.64 0,1126 74.17,1104 136,1104 430,1104 595,996 652,996 825.94,996 825.94,1023.58 816,1036 684,1187 684,1275 846,1275 853,1282 853,1997 854,1998 851,2001 393.7,1973.52 47,2001
NetD2_2 on Top Layer "NETD2_2_L01_P032" (solid, pour order 32): 1055,1490 1057,1488 1057,1251 1096,1212 1096,990 992,990 972,976 972,950 1160,950 1202,992 1333,992 1333,1486 1327,1492
NetR1_2 on Top Layer "NETR1_2_L01_P028" (solid, remove dead copper, pour order 28): 691,1245 691,1187 751,1187 772,1166 772,1103 823,1103 823,1246.91
NetD8_2 on Top Layer "NETD8_2_L01_P003" (solid, remove dead copper, pour order 3): 2227,835 2227,843 2409.61,843 2411.58,841.03 2411.58,770.1 2436.87,744.8 2531,744.8 2531,565.98 2528.98,568 2361,568 2361,726.76 2362.02,727.78 2227,727.78
NetD5_1 on Top Layer "NETD5_1_L01_P002" (solid, pour order 2): 2227,956.69 2475.31,956.69 2531,901 2531,755 2440,755 2421,774 2421,852 2230,852 2228,854
NetD3_2 on Top Layer "NETD3_2_L01_P000" (solid, remove dead copper, pour order 0): 2233,1143 2583,1143 2583,1342.28 2567.11,1342.28 2561.39,1348 2396,1348 2396,1252 2377.8,1233.8 2229,1233.8
GND2 on Top Layer "GND2_L01_P006" (solid, remove dead copper, pour order 6): 2229,1263.21 3275,1263.71 3346.46,1263.21 3346.46,1181.1 3346.46,984.25 3346.46,941.62 3275,943.9 2229,943.9
+15 on Top Layer "+15_L01_P007" (solid, remove dead copper, pour order 7): 2227,956.69 3275,956.69 3351.47,984.25 3351.47,787.4 3351.47,594.88 3349.67,592.05 3346.9,654.53 3275,654.53 2227,654.53
+5 on Bottom Layer "+5_L02_P022" (solid, pour order 22): 1774,1332 1774,1665 3275,1665 3351.47,1665 3351.47,1332 3275,1332
GND2 on Bottom Layer "GND2_L02_P021" (solid, pour order 21): 1774,999 1774,1332 3275,1332 3351.47,1332 3355.69,999 3275,999
GND1 on Bottom Layer "GND1_L02_P023" (solid, pour order 23): 1774,1665 1774,2000 2497,1954.01 3227,1991.52 3248.88,1974.88 3264.51,1954.01 3318.23,1954.01 3347.73,1927.59 3351.45,1893.88 3344.81,1787.91 3349.31,1685.14 3332.42,1665 3271.19,1665
GND3 on Bottom Layer "GND3_L02_P017" (solid, pour order 17): 1764,0 1764,333 3265.73,333 3351.47,333 3375.26,14.35 3367.27,7.41 3227,5
GND on Bottom Layer "GND_L02_P015" (solid, pour order 15): 16.98,10.98 27.1,1.86 1763.4,0 1763.4,1995 1590.78,1969.72 229.72,1973.08 43.75,2001.25 0.75,1958.25 1.91,26.04
+15 on Bottom Layer "+15_L02_P019" (solid, pour order 19): 1764,666 1764,999 3275,999 3351.47,999 3358.64,666 3275,666
-15 on Bottom Layer "-15_L02_P018" (solid, pour order 18): 1764,333 1764,666 3275,666 3351.47,666 3356.88,333 3275,333

## Keep-outs
Keep-Out Layer:
  lines w10: 3346.46,181.18 3346.46,1918.5 ccw(c3296.46,1918.5) 3296.46,1968.5 50,1968.5 ccw(c50,1918.5) 0,1918.5 0,1574.8 0,50 ccw(c50,50) 50,0 3296.46,0 ccw(c3296.46,50) 3346.46,50 3346.46,196.85

## Other copper
Top Layer:
  rectangle net Vin: 849.93,1504 1765,1953
  rectangle net NetC6_1: 861,1440 1008,1481
  rectangle net NetD1_1: 910,1328 1022,1373
  rectangle net Vin: 1184,731 1307,953
  rectangle net GND1: 1775,1452 2202,1600
  rectangle net GND1: 2193,1244 2359,1611
  rectangle net NetR3_2: 1002.42,1005 1085,1035
Bottom Layer:
  rectangle net GND: 840,975 960,1134

## Text inside footprints (layer, text, board x,y; h text height)
T1: Mechanical 13 "1" at 1147.52,1257.78 h50; Mechanical 13 "6" at 1147.52,667.78 h50; Mechanical 13 "7" at 2367.52,667.78 h50; Mechanical 13 "12" at 2367.52,1257.78 h50